# Altium PCB Layout_CW3.PcbDoc
Units mm, origin at the board's own origin, x right, y up, seen from the top; angles counter-clockwise.
Board outline 100 x 80 mm, 4 copper layers (Top Layer, Layer 1, Layer 2, Bottom Layer), stack 0.603 mm thick; 15 components, 35 nets, 72 pads, 0 vias.
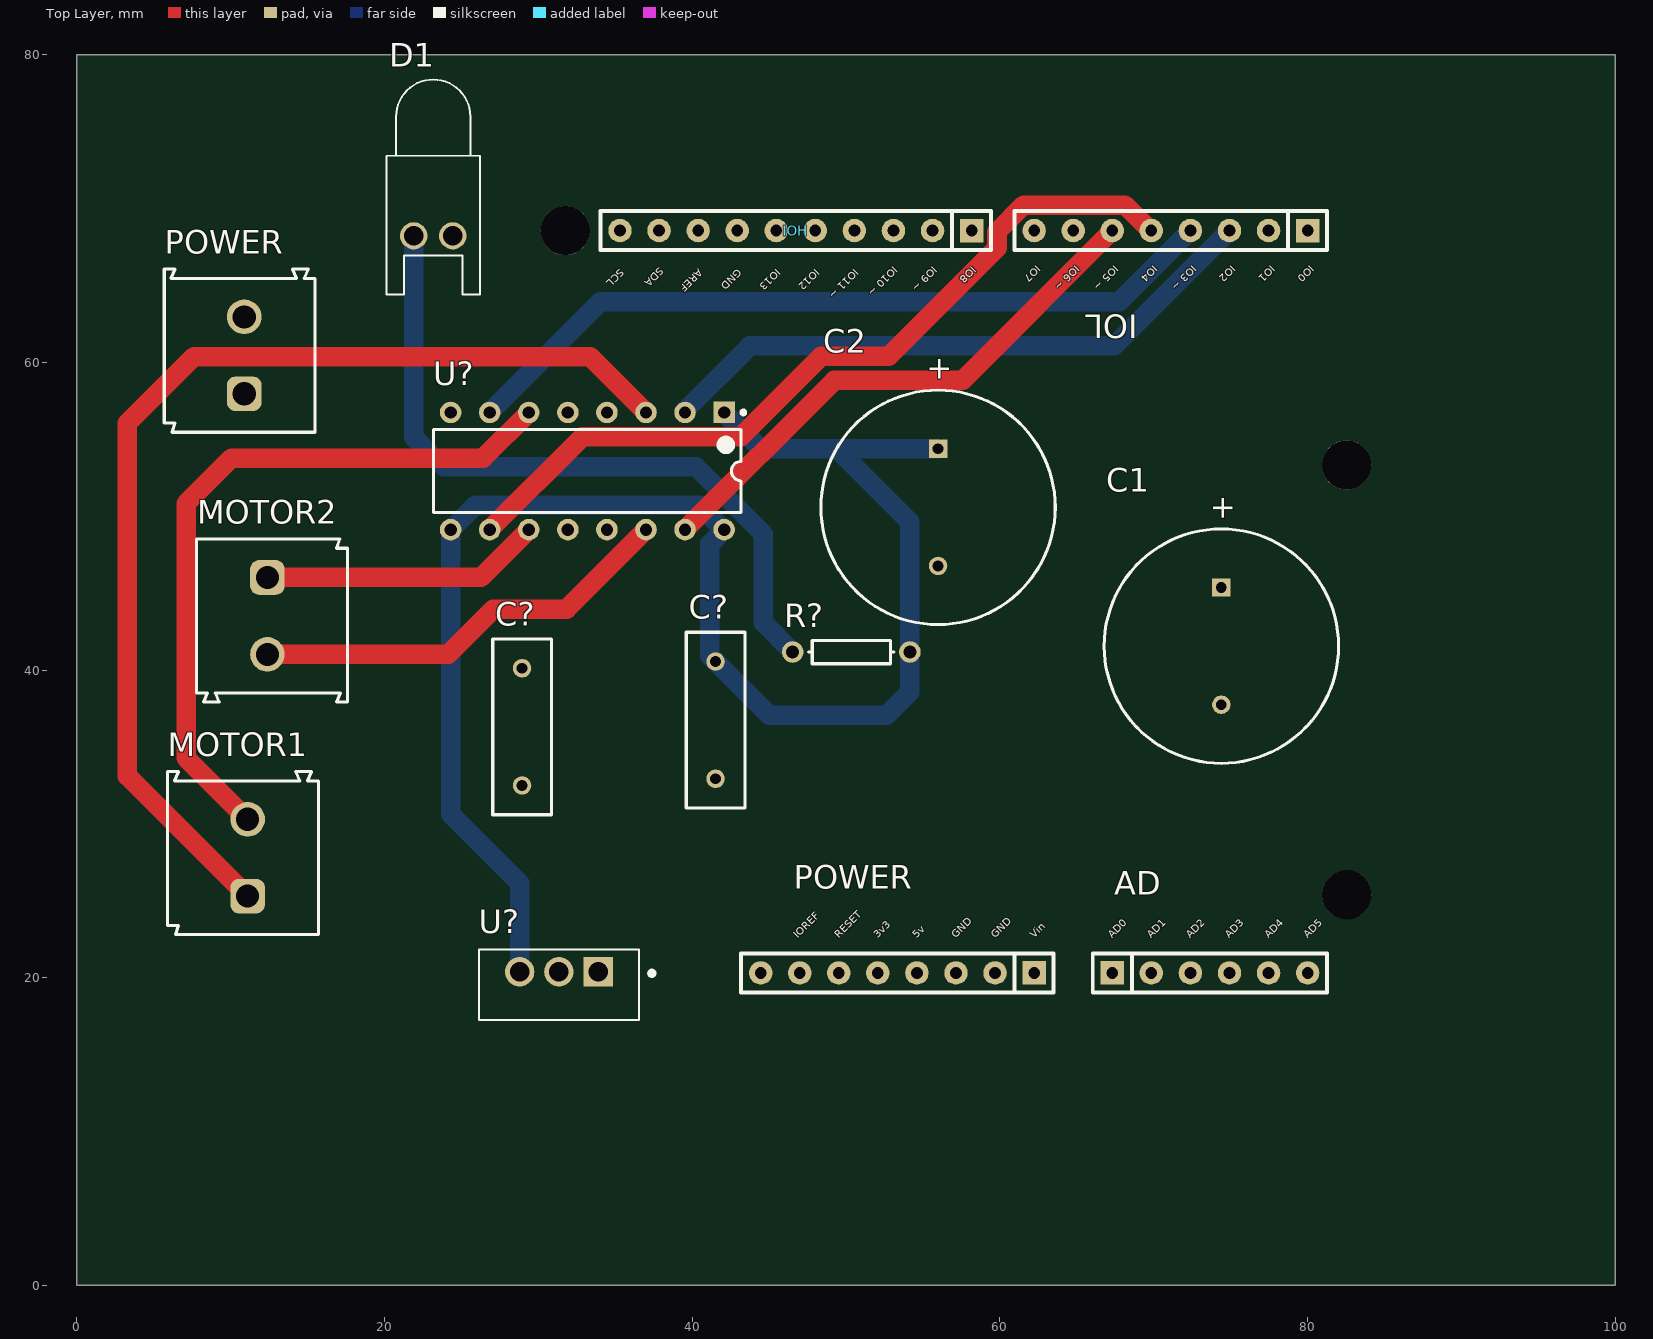
[diagram p0: Top Layer view]
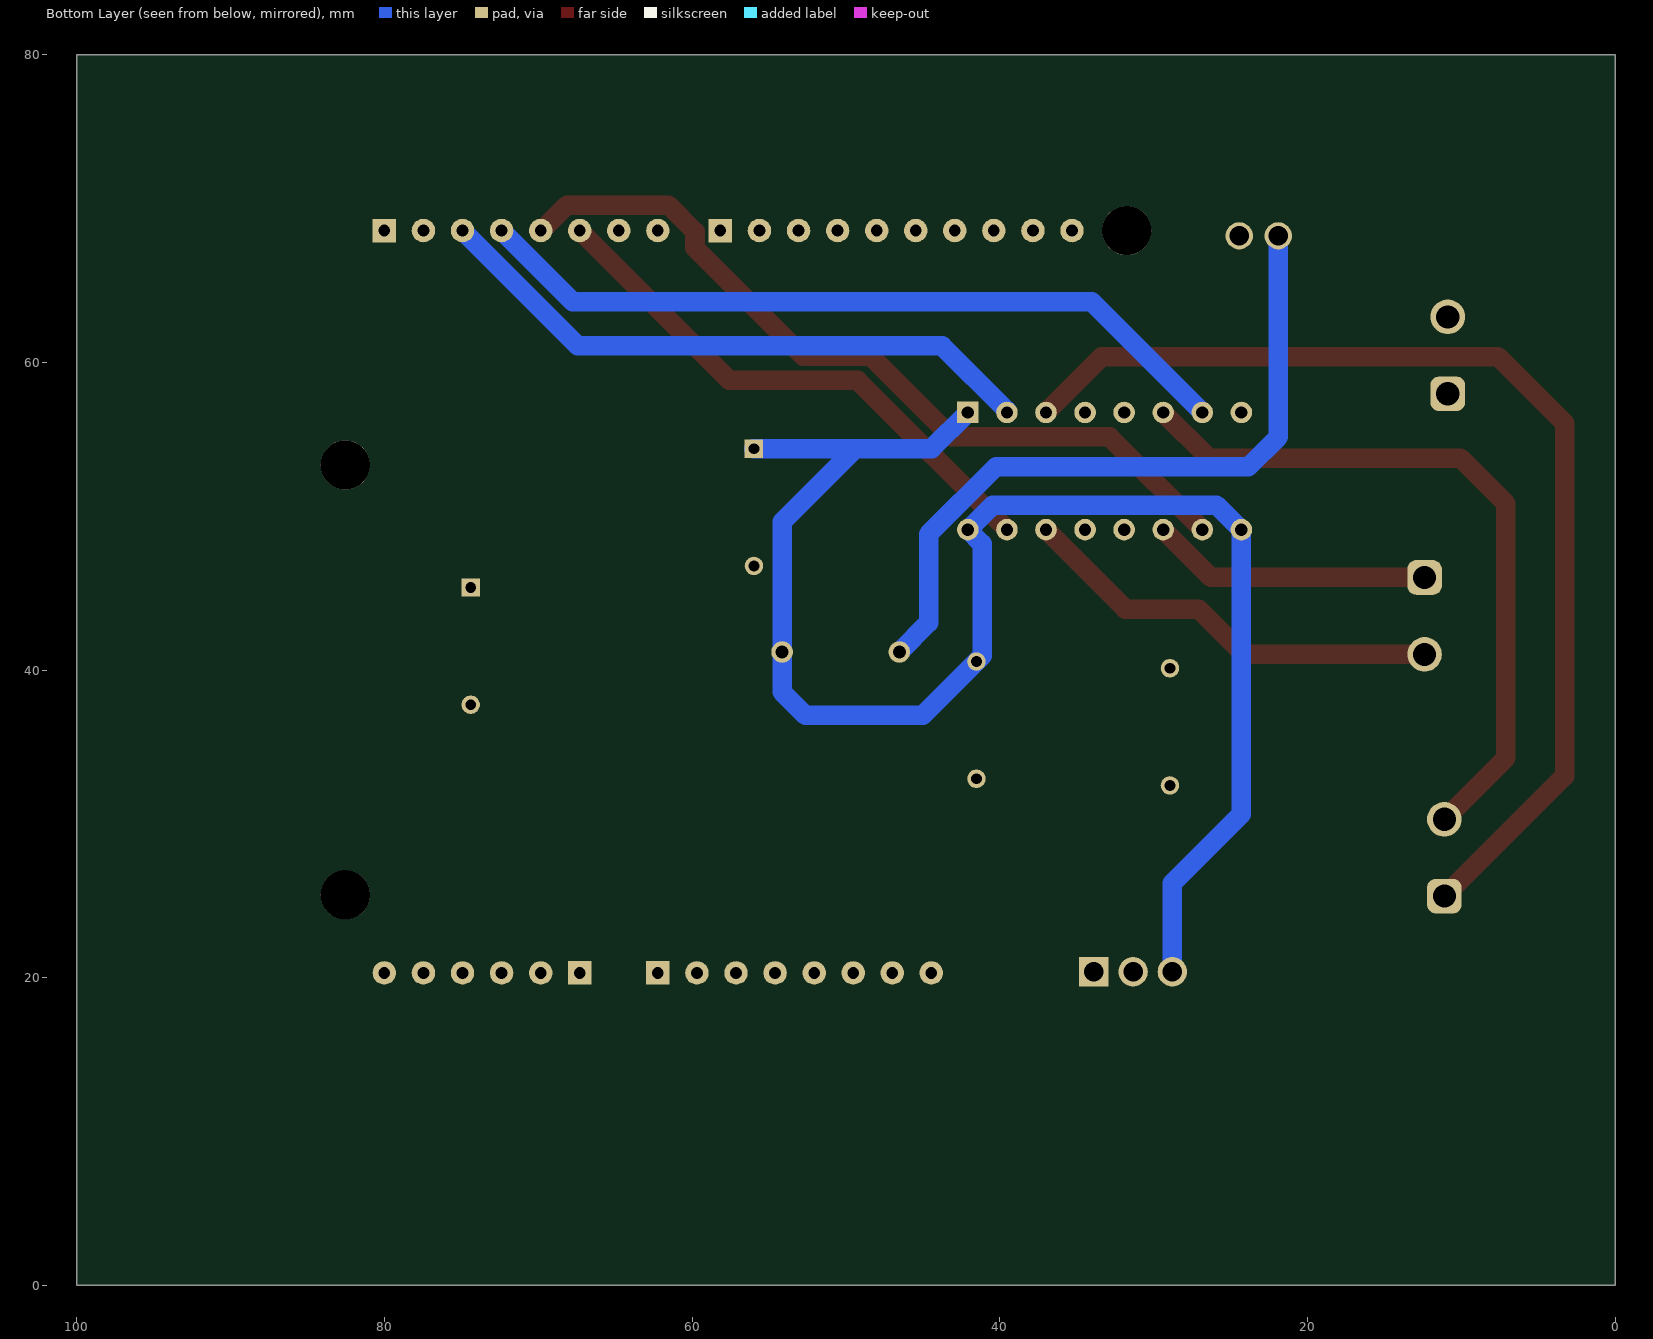
[diagram p1: Bottom Layer view, seen from below]
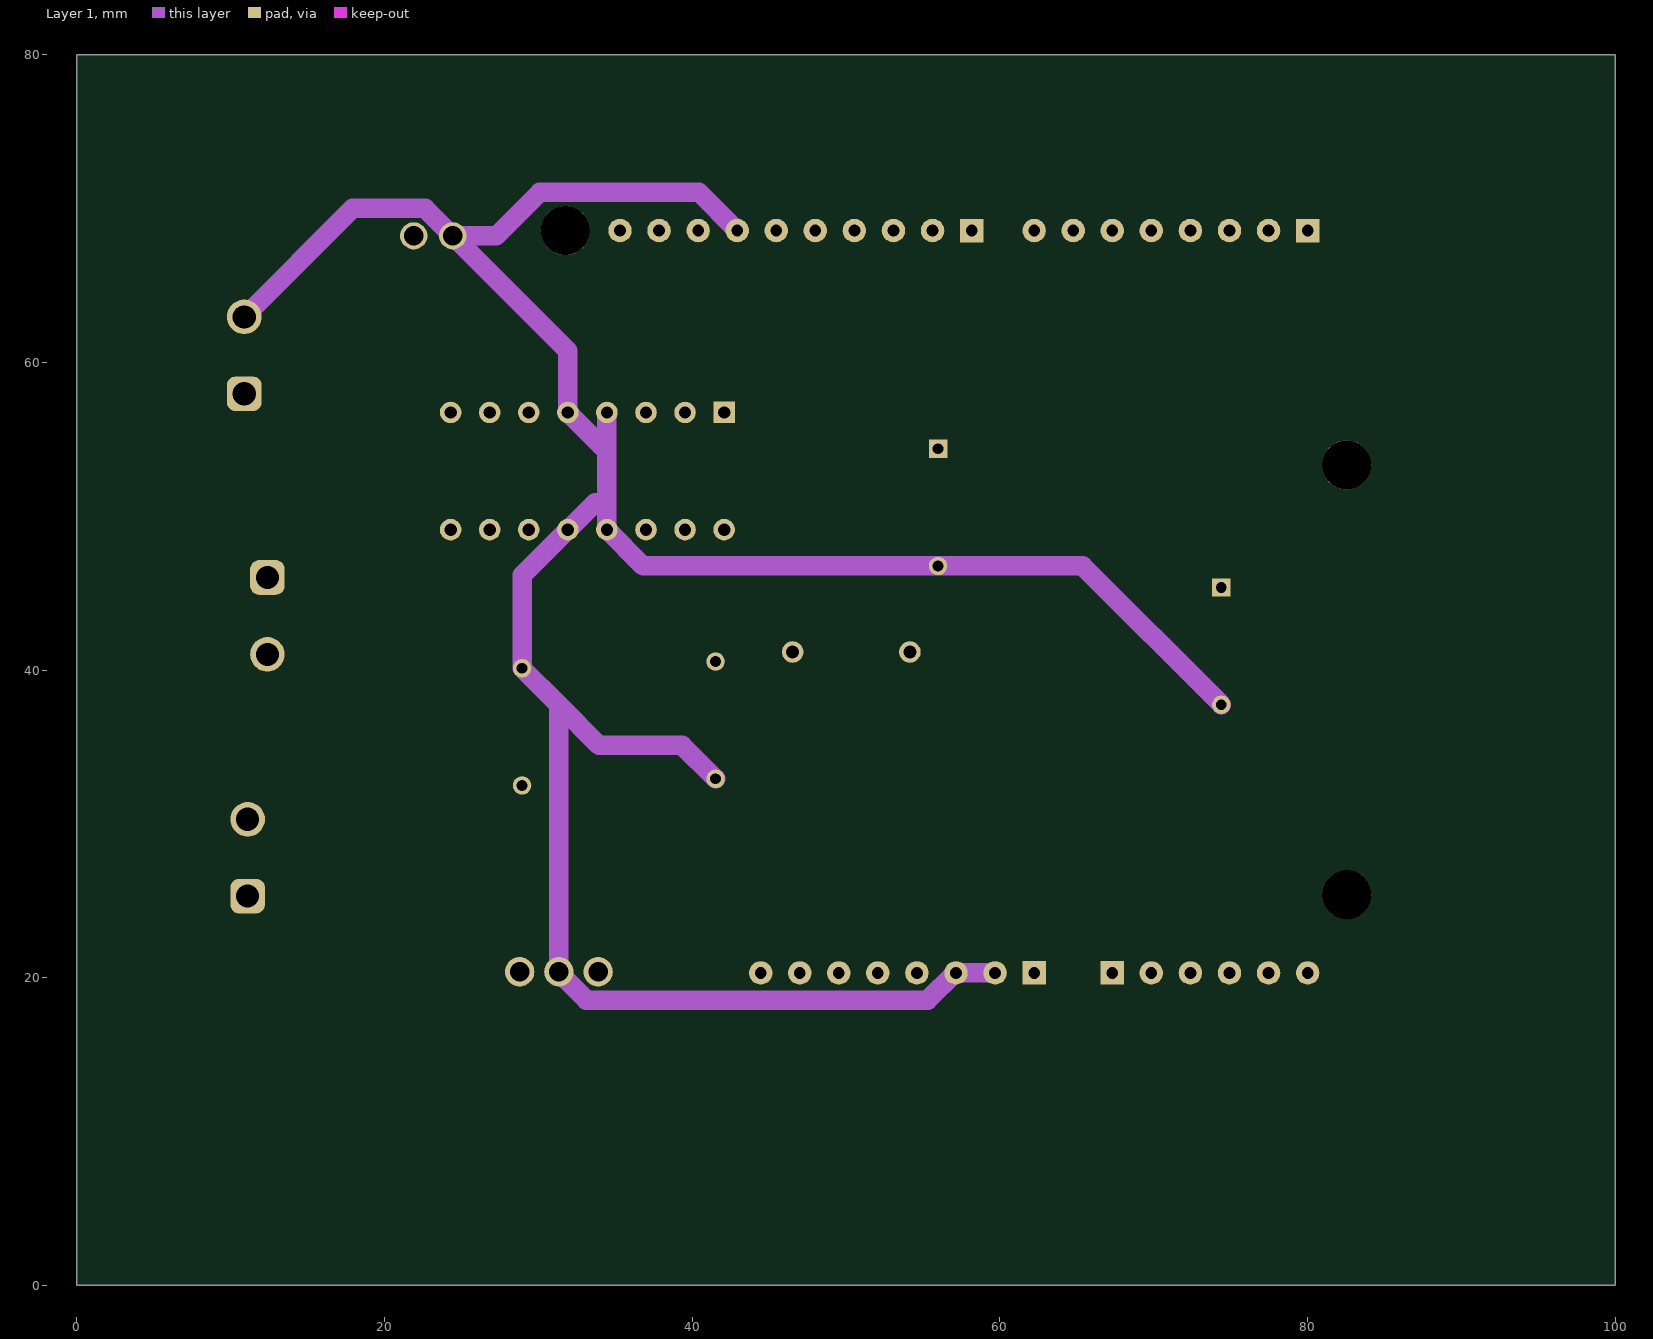
[diagram p2: Layer 1]
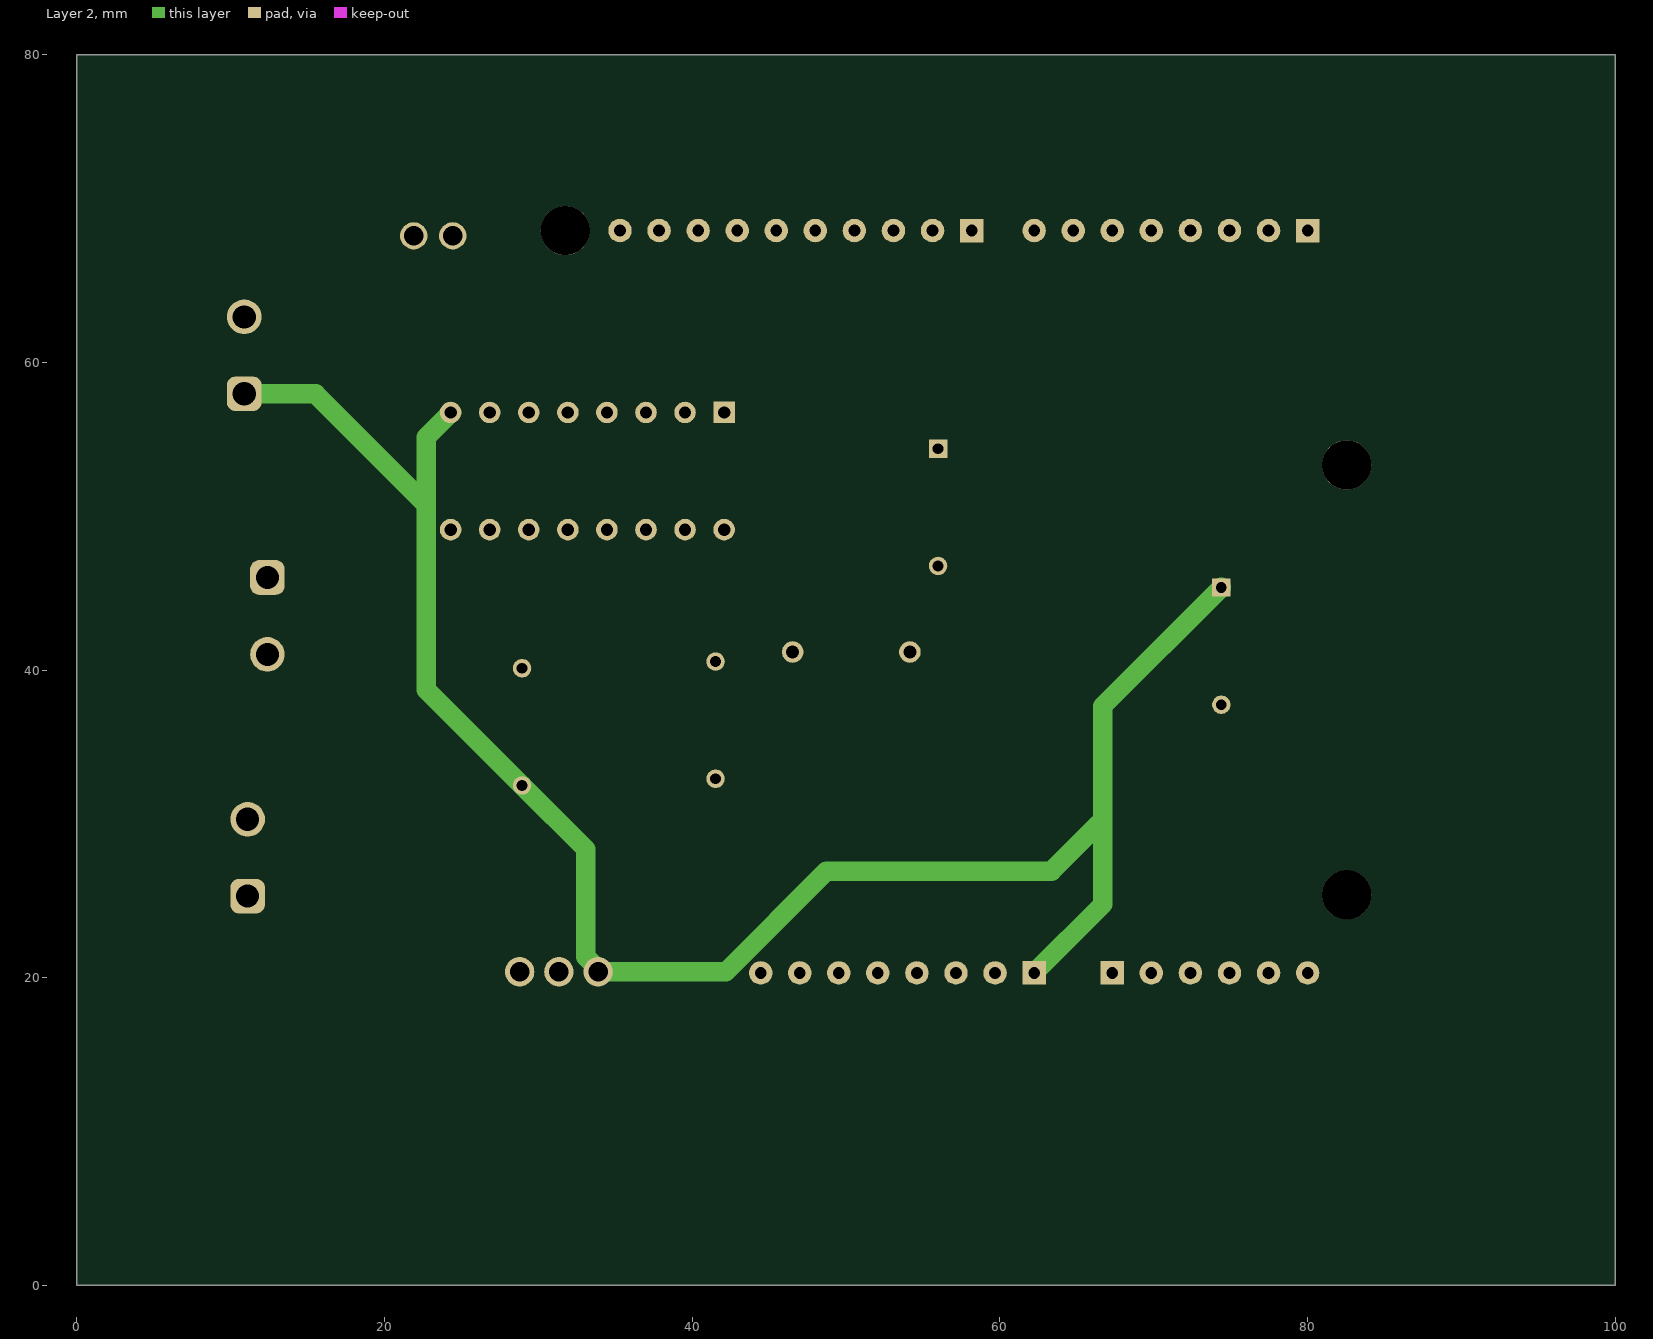
[diagram p3: Layer 2]
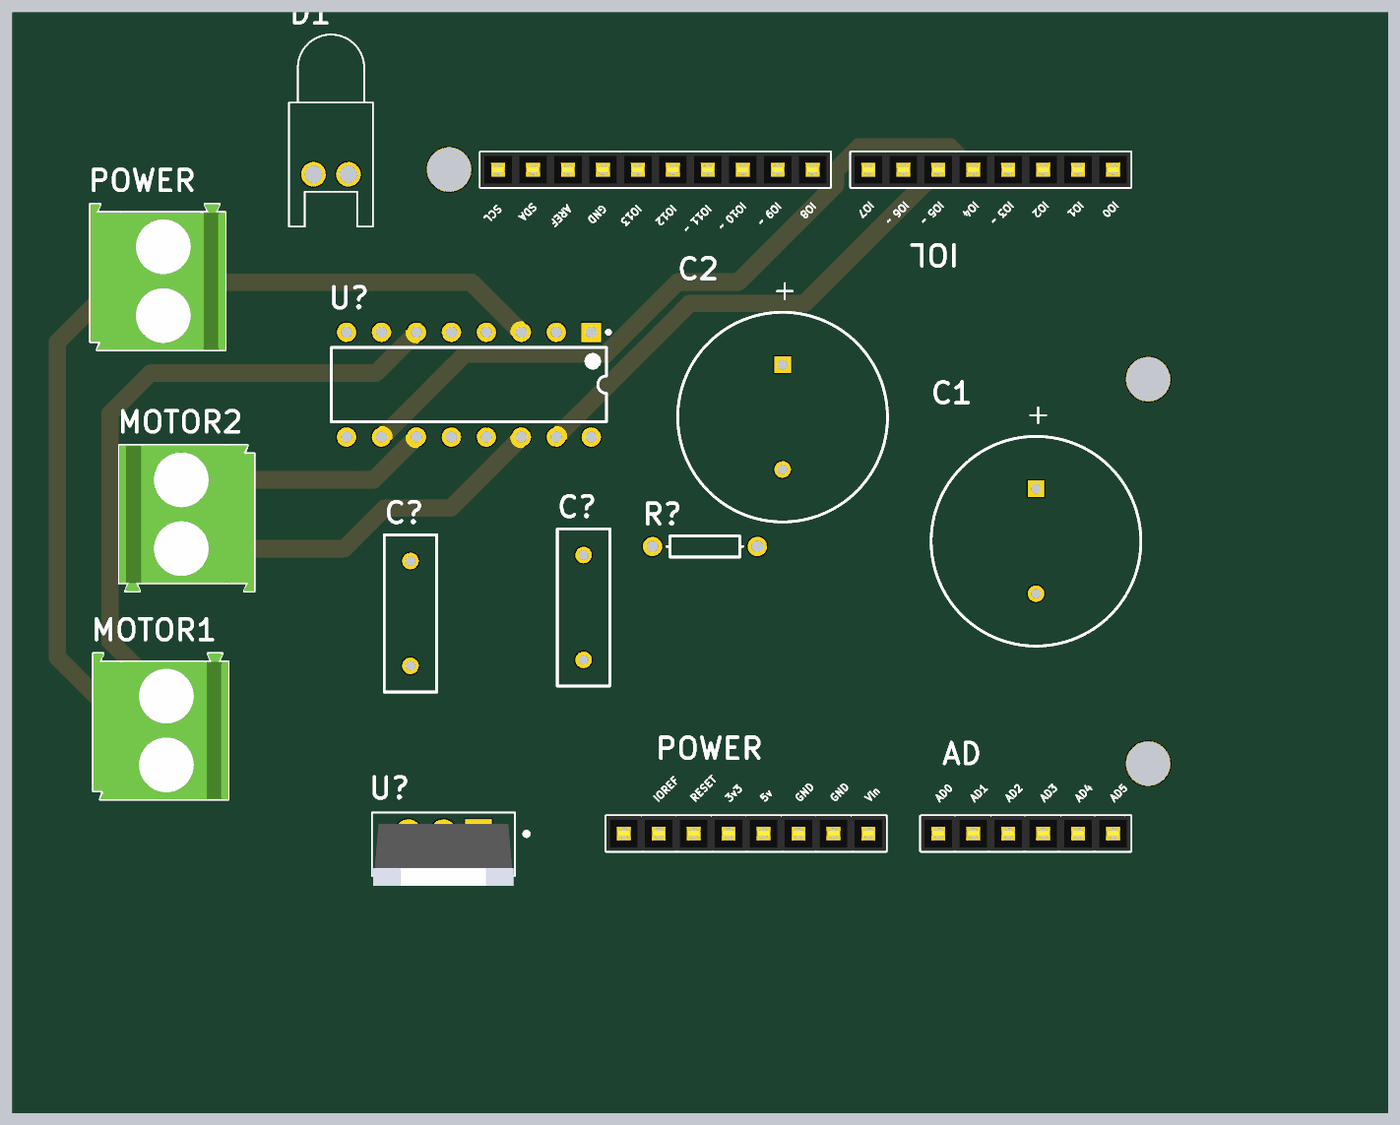
[diagram p4: 3D render of the assembled board from above, using the file's embedded part models]

## Layer stack, top to bottom
Top Solder: solder mask 0.0102, Solder Resist, Dk 3.5
Top Layer: signal copper 0.0356
Dielectric 1: prepreg 0.0711, PP-006, Dk 4.1
Layer 1: signal copper 0.035
Dielectric1: dielectric 0.32, FR-4, Dk 4.8
Layer 2: signal copper 0.035
Dielectric 2: prepreg 0.0711, PP-006, Dk 4.1
Bottom Layer: signal copper 0.0356
Bottom Solder: solder mask 0.0102, Solder Resist, Dk 3.5

## Board outline
0,0 100,0 100,80 0,80

## Design rules (kind name [scope] priority, off if disabled: settings)
Clearance Clearance_5 [All] p1: gap=0.254 ignorepadtopadclearanceinfootprint=FALSE except(0.3: Arc-Arc Arc-Track Track-Track)
Clearance Clearance_4 [All] p2: gap=0.254 ignorepadtopadclearanceinfootprint=FALSE
Clearance Clearance_3 [All] p3: gap=0.254 ignorepadtopadclearanceinfootprint=FALSE
Clearance Clearance_2 [All] p4: gap=0.254 ignorepadtopadclearanceinfootprint=FALSE
Clearance Clearance_1 [All] p5: gap=0.254 ignorepadtopadclearanceinfootprint=FALSE
Clearance [All] p6: gap=0.254 ignorepadtopadclearanceinfootprint=FALSE except(0.4: Arc-Arc Arc-Track Track-Track)
PolygonConnect [All] p1: connectstyle=Relief reliefconductorwidth=0.254 reliefentries=4 polygonreliefangle="90 Angle" airgapwidth=0.254
RoutingVias [All] p1: holewidth=0.711 width=1.27 viastyle="Through Hole" minholewidth=0.711 minwidth=1.27 maxholewidth=0.711 maxwidth=1.27
SilkToSolderMaskClearance SilkscreenOverComponentPads [IsPad] p1: minsilkscreentomaskgap=0.254 clearancetoexposedcopper=TRUE
SolderMaskExpansion [All] p1: expansion=0.102 istentingtop=FALSE
UnRoutedNet [All] p1: checkbadconnections=TRUE
Width [All] p1: maxlimit=10 minlimit=0.257 preferedwidth=1.27 minimp=50.000000 maximp=50.000000 favimp=50.000000
28 further rules are at their usual default settings.

## Classes and differential pairs
component class ArduinoUno_Motor_Shield: AD IOH IOL

## Components (designator, comment, footprint, x,y, rotation, side; value= is the part's Value field where it differs from the comment)
AD "AD" "Header 6x1 8.5mm" 67.31,20.32 r0 top locked
C1 "" RB7.6-15 74.4,41.564 r90 top value=47uF
C2 "" RB7.6-15 55.986,50.587 r90 top value=47uF
C? "Cap" RAD-0.3 28.942,36.316 r90 top value=100nF
C? "Cap" RAD-0.3 41.521,36.751 r270 top value=100nF
D1 "Red led" LED-0 23.167,68.237 r180 top
IOH "IOH" "Header 10x1 8.5mm" 58.166,68.58 r180 top locked
IOL "IOL" "Header 8x1 8.5mm" 80.01,68.58 r180 top locked
MOTOR1 "691216710002" 691216710002 10.8,27.807 r90 top
MOTOR2 "691216710002" 691216710002 12.687,43.526 r270 top
POWER "691216710002" 691216710002 10.58,60.469 r90 top
POWER "POWER_UNO" "Header 8x1 8.5mm" 62.23,20.32 r180 top locked
R? "Res1" AXIAL-0.3 50.344,41.181 r180 top value=220
U? "L293D" STM-L293D-16 33.188,52.945 r270 top
U? "L7805CV-DG" TO255P1040X460X2890-3 31.336,19.544 r180 top

## Footprints (in the part's own frame and the unit in brackets; to place one, negate y for a bottom-side part, rotate by r counter-clockwise, add the part's x,y. Pads: shape width x height; smd on the part's side, far side on the other; paste and mask are expansions set on the pad)
691216710002 [mm] "Serie 2167 - 5.00 mm _ 2 pins"
  rrect50% 2.25x2.25 hole 1.5: 1(-2.5,-0.3)
  round 2.25 hole 1.5: 2(2.5,-0.3)
  silkscreen extent -5,-4.9 5.6,4.9, body extent -5,-4.9 5.6,4.9, height 13.85
AXIAL-0.3 [mm] "Axial Device, Thru-Hole; 2 Leads; 0.3 in Pin Spacing"
  round 1.4 hole 0.85: 1(-3.81,0) 2(3.81,0)
  silkscreen extent -2.77,-0.76 2.77,0.76
"Header 6x1 8.5mm" [mil] "Stackable 6 pin header"
  rect 60x60 hole 30: 1(0,0)
  round 60 hole 30: 2(100,0) 3(200,0) 4(300,0) 5(400,0) 6(500,0)
  silkscreen extent -50,-50 550,50, body extent -50,-50 550,50, height 335
"Header 8x1 8.5mm" [mil] "Stackable 8 pin header"
  rect 60x60 hole 30: 1(0,0)
  round 60 hole 30: 2(100,0) 3(200,0) 4(300,0) 5(400,0) 6(500,0) 7(600,0) 8(700,0)
  silkscreen extent -50,-50 750,50, body extent -50,-50 750,50, height 335
"Header 10x1 8.5mm" [mil] "Stackable 10 pin header"
  rect 60x60 hole 30: 1(0,0)
  round 60 hole 30: 2(100,0) 3(200,0) 4(300,0) 5(400,0) 6(500,0) 7(600,0) 8(700,0) 9(800,0) 10(900,0)
  silkscreen extent -50,-50 950,50, body extent -50,-50 950,50, height 335
LED-0 [mil] "LED; 2 Leads"
  round 70 hole 50: 1(50,0) 2(-50,0)
  silkscreen extent -120,-400 120,150
RAD-0.3 [mm] "Radial Cap, Thru-Hole; 2 Leads; 0.3 in Pin Spacing"
  round 1.2 hole 0.7: 1(-3.81,0) 2(3.81,0)
  silkscreen extent -5.71,-1.91 5.72,1.9
RB7.6-15 [mm] "Polarized Capacitor (Radial); 2 Leads"
  rect 1.2x1.2 hole 0.7: 1(3.81,0)
  round 1.2 hole 0.7: 2(-3.81,0)
  silkscreen extent -7.62,-7.62 7.62,7.62
STM-L293D-16 [mm] "DIP, 16-Leads, Body 20x6.85mm, Pitch 2.54mm"
  rect 1.4x1.4 hole 0.8: 1(-3.81,8.89)
  round 1.4 hole 0.8: 2(-3.81,6.35) 3(-3.81,3.81) 4(-3.81,1.27) 5(-3.81,-1.27) 6(-3.81,-3.81) 7(-3.81,-6.35) 8(-3.81,-8.89) 9(3.81,-8.89) 10(3.81,-6.35) 11(3.81,-3.81) 12(3.81,-1.27) 13(3.81,1.27) 14(3.81,3.81) 15(3.81,6.35) 16(3.81,8.89)
  silkscreen extent -3.93,-10 2.7,10.27, body extent -3.93,-10 3.93,10, height 5.1
TO255P1040X460X2890-3 [mm]
  rect 1.91x1.91 / inner round 1.91 / far side rect 1.91x1.91 hole 1.27: 1(-2.55,-0.85)
  round 1.91 hole 1.27: 2(0,-0.85) 3(2.55,-0.85)
  silkscreen extent -6.19,-2.3 5.2,2.3, body extent -5.1,-1.49 5.1,3.01, height 19.22

## Part data
AD: Supplier Part Number 1=2699089, Supplier 1=Arrow, Supplier 2=Digi-Key, Supplier 3=Arrow, Supplier 4=Arrow, Supplier Part Number 2=SAM1198-06-ND, Supplier Part Number 3=2699088, Supplier Part Number 4=2699075
C1 C2: library part "Cap Pol1", "Polarized Capacitor (Radial)", LatestRevisionDate=17-Jul-2002, LatestRevisionNote="Re-released for DXP Platform.", PackageDescription="Polarized Capacitor (Radial); 2 Leads", PackageReference=RB7.6-15, Published=8-Jun-2000, Publisher="Altium Limited"
C? C?: "Capacitor", LatestRevisionDate=17-Jul-2002, LatestRevisionNote="Re-released for DXP Platform.", PackageDescription="Radial Cap, Thru-Hole; 2 Leads; 0.3 in Pin Spacing", PackageReference=RAD-0.3, Published=8-Jun-2000, Publisher="Altium Limited"
D1: library part LED0, "Typical INFRARED GaAs LED", LatestRevisionDate=08-Jul-2005, LatestRevisionNote="Mech Layer 1 removed.", PackageDescription="LED; 2 Leads", PackageReference=LED-0, Published=8-Jun-2000, Publisher="Altium Limited"
IOH: Supplier Part Number 1=2698803S4475693N1004, Supplier 1=Arrow, Supplier 2=Digi-Key, Supplier 3=Arrow, Supplier Part Number 2=SAM1198-10-ND, Supplier Part Number 3=2698789
IOL POWER: Supplier Part Number 1=SAM1198-08-ND, Supplier 1=Digi-Key, Supplier 2=Arrow, Supplier 3=Arrow, Supplier 4=Arrow, Supplier Part Number 2=2698939, Supplier Part Number 3=2698940, Supplier Part Number 4=2698925
MOTOR1 MOTOR2 POWER: library part CMP-1502-02532-2, Current Rating=14A, Max Operating Temperature=120°C, Min Operating Temperature=-30°C, Voltage Rating=300V, Contact Material="Nickel, Tin", Height=13.9mm, Lead Pitch=5mm, NexarPartId=94172716, Number of Contacts=2, Number of Pins=2, Number of Rows=1, Packaging=Box, RoHS=Non-Compliant
R?: "Resistor", LatestRevisionDate=17-Jul-2002, LatestRevisionNote="Re-released for DXP Platform.", PackageDescription="Axial Device, Thru-Hole; 2 Leads; 0.3 in Pin Spacing", PackageReference=AXIAL-0.3, Published=8-Jun-2000, Publisher="Altium Limited"
U?: library part CMP-2000-06524-1, "Push-Pull Four Channel Driver with Diode, 4.5 to 36 V, -40 to 150 degC, 16-Pin PDIP, RoHS, Tube", Current - Output / Channel=600mA, Current - Peak Output=1.2A, Manufacturer=STMicroelectronics, On-State Resistance=-, Operating Temperature=-40°C~150°C, Package / Case="16-DIP(0.300\",7.62mm)", Package Description="16-Pin Thru-Hole Dual-In-Line, Body 20 x 6.85 mm, Pitch 2.54 mm", Package Reference=DIP-16, Standard Package=25, Supplier Device Package=16-PowerDIP, Voltage - Supply=4.5V~36V, Category=IntegratedCircuits(ICs), Datasheet URL=http://www.st.com/st-web-ui/static/active/en/resource/technical/document/datasheet/CD00000059.pdf, Datasheet Version=07/2003, Dynamic Catalog=HalfBridge, Family=PMIC-MOSFET,BridgeDrivers-InternalSwitch, Input Type=Non-Inverting, Manufacturer URL=http://www.st.com/, Mounting Technology=ThroughHole, Mounting Type=ThroughHole, Number of Outputs=4, Other Names=497-2936-5, Other Related Documents=L293DViewAllSpecifications, Packaging=Tube, PartNumber=L293D, Series=-, Type=HalfBridge
U?: "Linear Voltage Regulator IC Positive Fixed 1 Output 1.5A TO-220", Package="TO-220 STMicroelectronics", Check_prices=https://www.snapeda.com/parts/L7805CV-DG/STMicroelectronics/view-part/?ref=eda, MF=STMicroelectronics, MP=L7805CV-DG, SnapEDA_Link=https://www.snapeda.com/parts/L7805CV-DG/STMicroelectronics/view-part/?ref=snap

## Free pads (board coordinates)
  round 3.2 hole 3.2: 0(31.75,68.58) 0(82.55,25.4) 0(82.55,53.34)

## Nets (pads, with @x,y where several pads share a name; then routed paths per layer and width w, separated by ;. In a path a pad name is that pad's centre, name@x,y a point inside that pad or via, vN(x,y) a via of type N, cw(c..) or ccw(c..) an arc to the next point about the centre after c; other vN are vias at no path point)
3V3: POWER.5
5V: POWER.4
AD0: AD.1
AD1: AD.2
AD2: AD.3
AD3: AD.4
AD4: AD.5
AD5: AD.6
AREF: IOH.8
GND: C1.2 C2.2 C?.2 D1.2 IOH.7 POWER.2 POWER.3 U?.2@31.336,20.394 U?.4 U?.5 U?.12 U?.13 | length 184.6
  Layer 1 w1.27: POWER.2@10.88,62.969 17.926,70.015 22.634,70.015 24.412,68.237 D1.2 ; U?.4 34.458,54.371 ; C?.2@41.521,32.941 39.348,35.114 33.954,35.114 31.336,37.733 ; IOH.7 40.437,71.069 30.094,71.069 27.262,68.237 D1.2 ; POWER.2@59.69,20.32 POWER.3 57.081,20.32 55.311,18.55 33.122,18.55 31.336,20.336 31.336,20.394 31.336,37.733 ; C1.2 65.377,46.777 C2.2 36.816,46.777 U?.13 34.458,50.871 ; D1.2 31.918,60.756 U?.5 34.302,54.371 34.458,54.371 ; 31.336,37.733 28.942,40.126 28.942,46.16 U?.12 31.953,49.136 33.688,50.871 34.458,50.871 ; 34.458,50.871 34.458,54.371
IO0: IOL.1
IO1: IOL.2
IO2: IOL.3 U?.2@39.538,56.756 | length 40.4
  Bottom Layer w1.27: U?.2@39.538,56.756 39.562,56.78 39.562,56.898 43.751,61.086 67.436,61.086 IOL.3
IO3: IOL.4 U?.7 | length 50.5
  Bottom Layer w1.27: U?.7 34.022,63.94 67.75,63.94 IOL.4
IO4: IOL.5 U?.10 | length 53.1
  Top Layer w1.27: U?.10 32.869,55.167 43.146,55.167 48.395,60.416 52.783,60.416 59.817,67.45 59.817,68.502 61.546,70.231 68.13,70.231 69.781,68.58 IOL.5
IO5: IOL.6 U?.15 | length 35.8
  Top Layer w1.27: U?.15 49.248,58.846 57.576,58.846 IOL.6
IO6: IOL.7
IO7: IOL.8
IO8: IOH.1
IO9: IOH.2
IO10: IOH.3
IO11: IOH.4
IO12: IOH.5
IO13: IOH.6
IOREF: POWER.7
NetC2_1: C2.1 C?.1@41.521,40.561 R?.1 U?.1@42.078,56.756 U?.3@28.786,20.394 U?.9 U?.16 | length 106.2
  Bottom Layer w1.27: U?.3@28.786,20.394 28.786,26.16 24.298,30.648 U?.9 24.333,49.136 25.922,50.725 40.453,50.725 42.042,49.136 U?.16 41.151,48.209 41.151,40.931 45.022,37.06 52.626,37.06 54.154,38.588 54.154,49.636 49.393,54.397 ; U?.1@42.078,56.756 44.436,54.397 49.393,54.397 ; C2.1 49.393,54.397
NetD1_1: D1.1 R?.2 | length 46.9
  Bottom Layer w1.27: D1.1 21.897,55.173 23.844,53.226 40.234,53.226 44.622,48.838 44.622,43.092 R?.2
NetMOTOR1_1: MOTOR1.1 U?.3@36.998,56.756 | length 71
  Top Layer w1.27: MOTOR1.1 3.289,33.117 3.289,56.063 7.615,60.39 33.364,60.39 U?.3@36.998,56.756
NetMOTOR1_2: MOTOR1.2 U?.6 | length 46.9
  Top Layer w1.27: MOTOR1.2 7.108,34.298 7.108,50.834 10.057,53.782 26.404,53.782 U?.6
NetMOTOR2_1: MOTOR2.1 U?.11 | length 18.3
  Top Layer w1.27: MOTOR2.1 26.268,46.026 U?.11
NetMOTOR2_2: MOTOR2.2 U?.14 | length 28
  Top Layer w1.27: MOTOR2.2 24.134,41.026 27.077,43.97 31.832,43.97 U?.14
RESET: POWER.6
SCL: IOH.10
SDA: IOH.9
VIN: C1.1 C?.1@28.942,32.506 POWER.1 U?.1@33.886,20.394 U?.8 | length 123.1
  Layer 2 w1.27: POWER.1@10.88,57.969 15.521,57.969 22.709,50.781 ; U?.8 24.298,56.72 22.709,55.131 22.709,50.781 ; POWER.1@62.23,20.32 66.691,24.781 66.691,37.665 C1.1 ; 66.413,29.99 63.36,26.937 48.732,26.937 42.189,20.394 33.886,20.394 33.886,20.567 33.09,21.363 33.09,28.359 28.942,32.506 22.709,38.74 22.709,50.781
pads on no net: POWER.8

## Silkscreen, mask and mechanical layers (free items; w line width, h text height)
Top Overlay:
  text "IO7" at 62.357,66.368 h0.51 r225
  text "IO6 ~" at 64.897,66.368 h0.51 r225
  text "IO5 ~" at 67.437,66.368 h0.51 r225
  text "IO4" at 69.977,66.368 h0.51 r225
  text "IO3 ~" at 72.517,66.368 h0.51 r225
  text "IO2" at 75.057,66.368 h0.51 r225
  text "IO1" at 77.597,66.368 h0.51 r225
  text "IO0" at 80.137,66.368 h0.51 r225
  text "IO10 ~" at 53.086,66.294 h0.51 r225
  text "IO9 ~" at 55.626,66.294 h0.51 r225
  text "IO8" at 58.166,66.294 h0.51 r225
  text "SDA" at 37.846,66.241 h0.51 r225
  text "SCL" at 35.306,66.114 h0.51 r225
  text "AREF" at 40.386,66.114 h0.51 r225
  text "GND" at 42.926,66.114 h0.51 r225
  text "IO13" at 45.466,66.114 h0.51 r225
  text "IO12" at 48.006,66.114 h0.51 r225
  text "IO11 ~" at 50.546,66.114 h0.51 r225
  text "IOREF" at 46.863,22.532 h0.51 r45
  text "RESET" at 49.53,22.532 h0.51 r45
  text "3v3" at 52.07,22.532 h0.51 r45
  text "5v" at 54.61,22.532 h0.51 r45
  text "GND" at 57.15,22.532 h0.51 r45
  text "GND" at 59.69,22.532 h0.51 r45
  text "Vin" at 62.23,22.532 h0.51 r45
  text "AD0" at 67.31,22.532 h0.51 r45
  text "AD1" at 69.85,22.532 h0.51 r45
  text "AD2" at 72.39,22.532 h0.51 r45
  text "AD3" at 74.93,22.532 h0.51 r45
  text "AD4" at 77.47,22.532 h0.51 r45
  text "AD5" at 80.01,22.532 h0.51 r45
  text "RESET" at 49.403,-46.101 h0.51 r45
  text "3v3" at 51.943,-46.101 h0.51 r45
  text "5v" at 54.483,-46.101 h0.51 r45
  text "GND" at 57.023,-46.101 h0.51 r45
  text "GND" at 59.563,-46.101 h0.51 r45
  text "Vin" at 62.103,-46.101 h0.51 r45
Mechanical 1:
  circle w0.127: c31.75,68.58 r1.6
  circle w0.127: c82.55,25.4 r1.6
  circle w0.127: c30.48,20.32 r1.6
  circle w0.127: c82.55,53.34 r1.6
  lines w0.127: 16.51,17.78 82.55,17.78 82.55,19.05 85.09,21.59 85.09,55.88 82.55,58.42 82.55,68.58 80.01,71.12 16.51,71.12

## Text inside footprints (layer, text, board x,y; h text height)
C1: Top Overlay "+" at 75.137,49.696 h1.5 r90
C2: Top Overlay "+" at 56.723,58.719 h1.5 r90